# Altium PCB AM6442 X7.PcbDoc (part 2 of 2)
Units mm, origin at the board's own origin, x right, y up, seen from the top; angles counter-clockwise.
Board outline 52 x 52 mm, 8 copper layers (SU, GNDU, HSU, PWRU, PWRD, HSD, GNDD, SD), stack 0.757 mm thick; 216 components, 45 nets, 958 pads, 229 vias.
Unrouted connection lines stored in the file: 81.
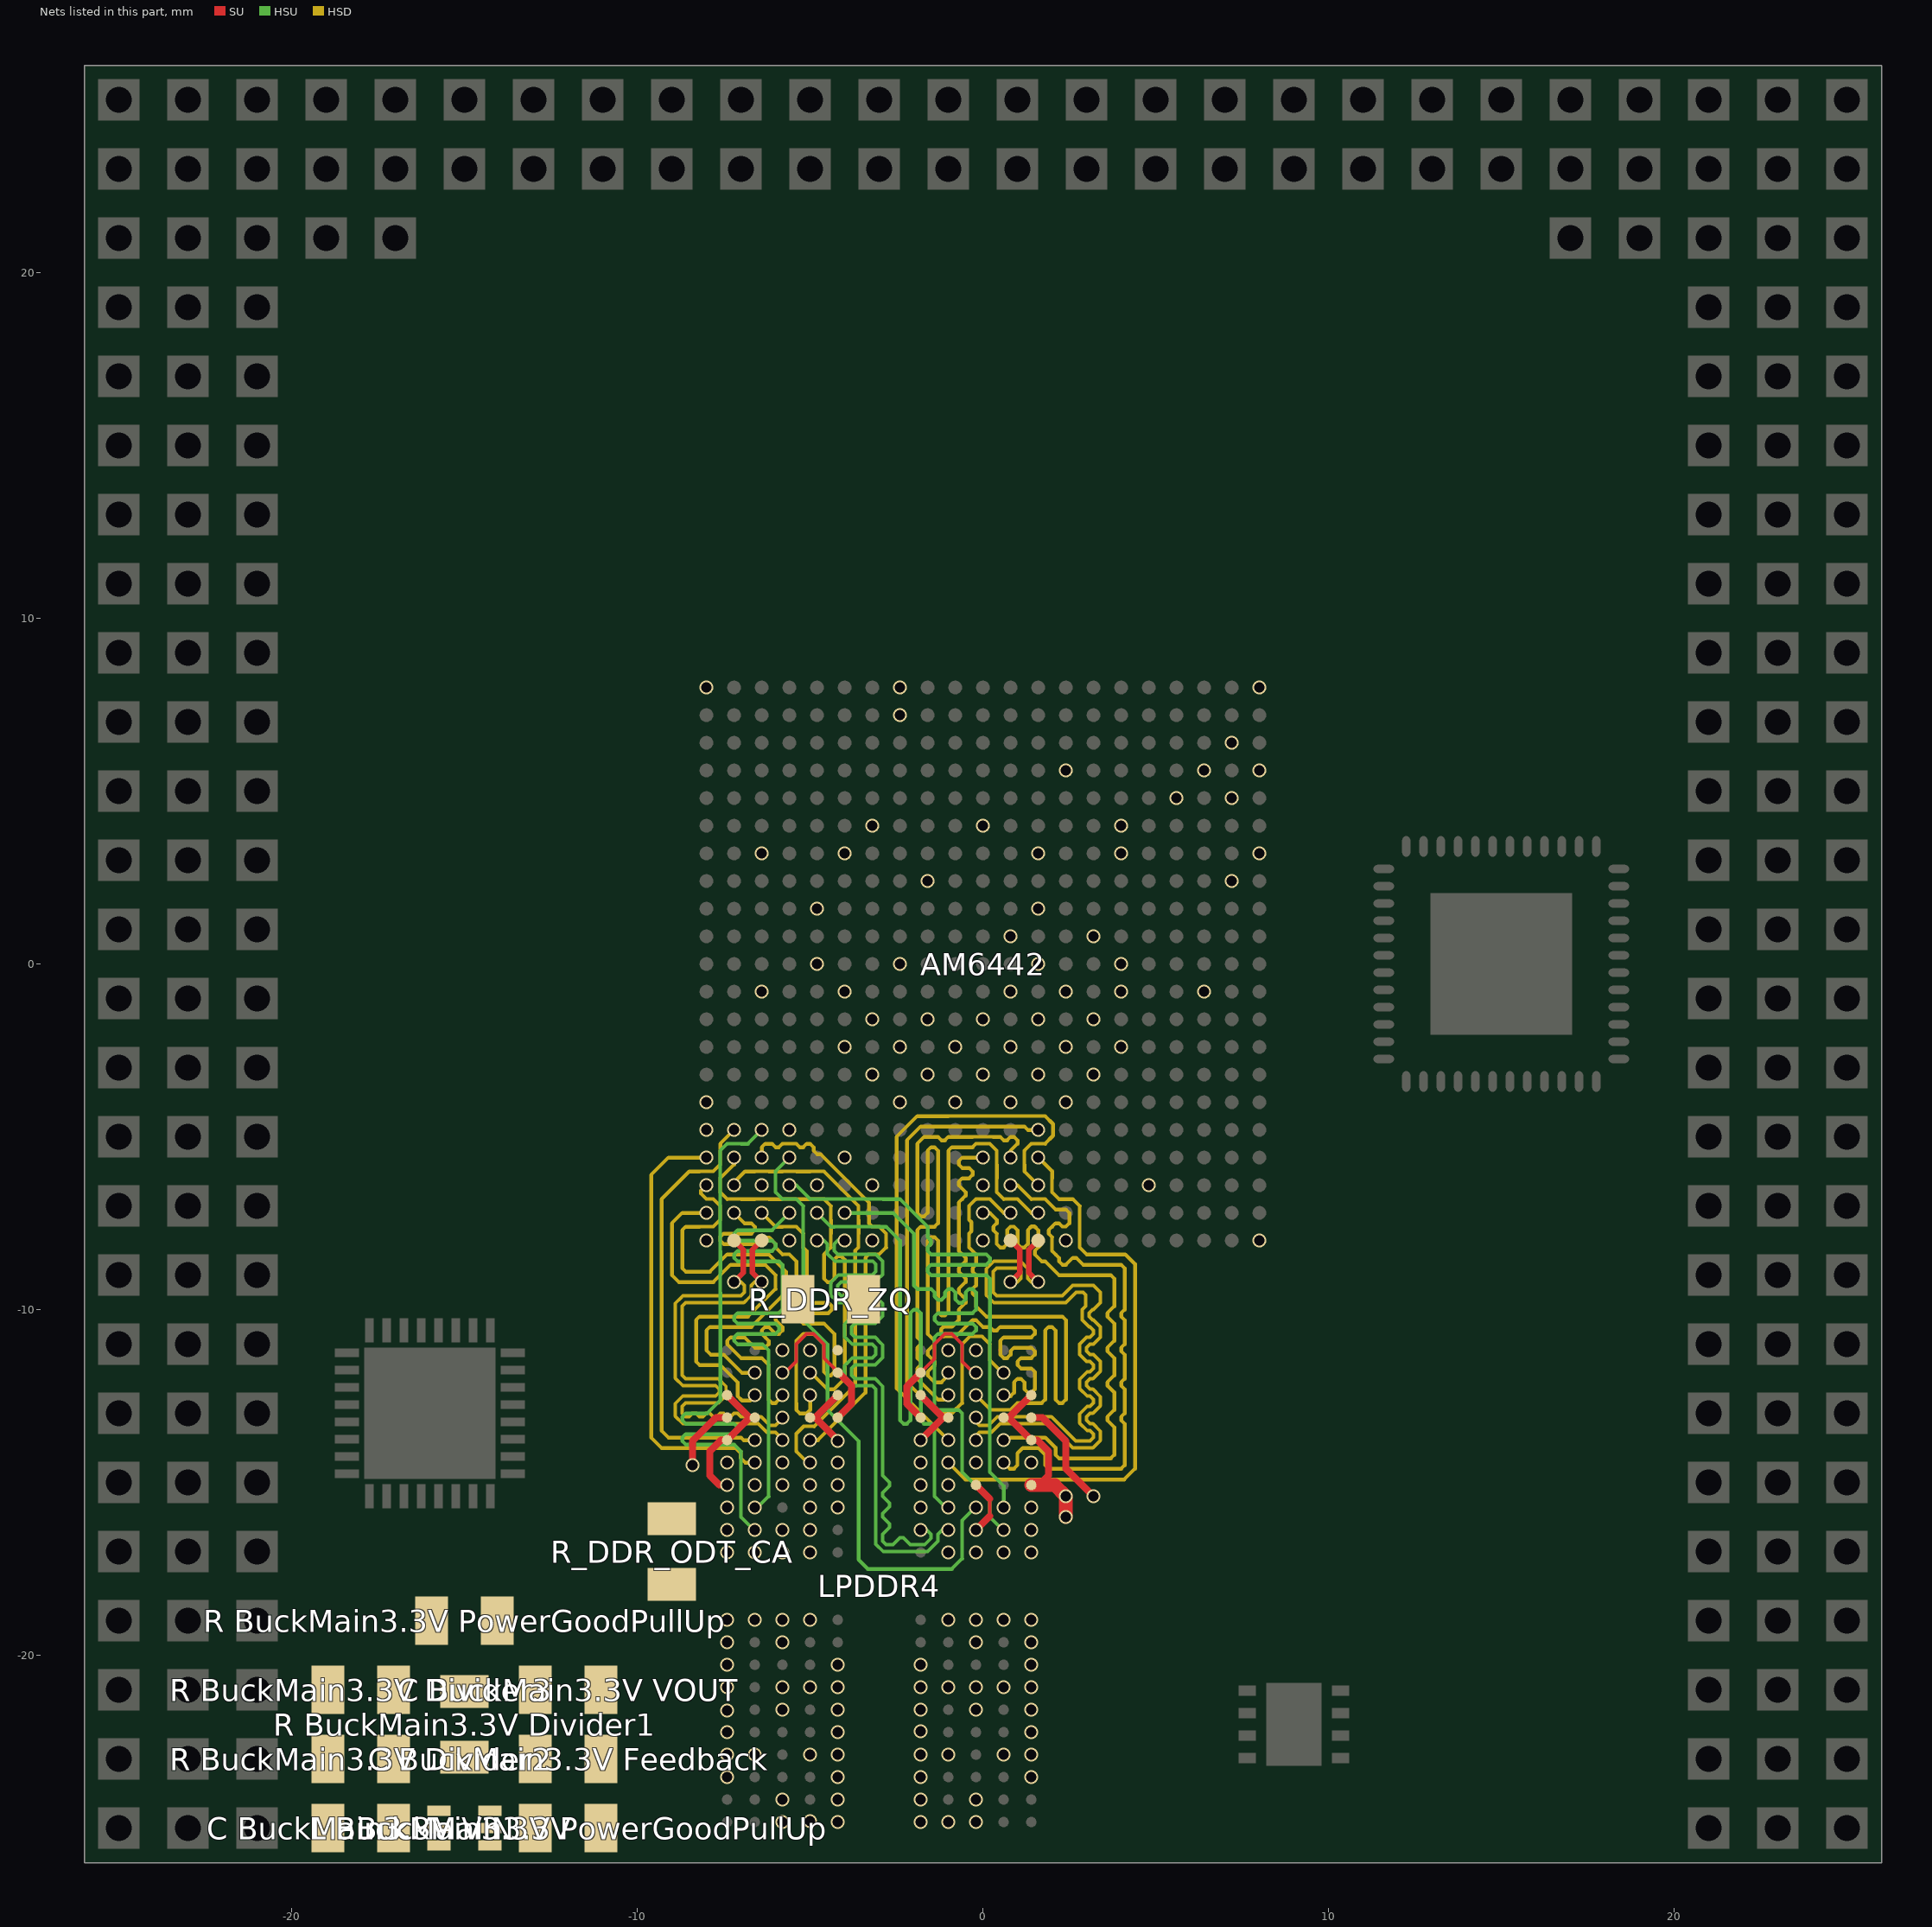
[diagram p6: the nets of this part, all layers, seen from the top]

## Part data
AM6442: library part AM6442, MANUFACTURER_NAME="Texas Instruments", MANUFACTURER_PART_NUMBER=AM6442BSDGHAALV, Package=BGA441C80P21X21_1720X1720X265, DeviceSetName=AM6442BSDGHAALV, GateName_1=G$1, HEIGHT=2.652mm, LibraryName=TOTUDU, MOUSER_PRICE-STOCK=https://www.mouser.co.uk/ProductDetail/Texas-Instruments/AM6442BSDGHAALV?qs=9vOqFld9vZW%2FXHhHYd31hA%3D%3D, SymbolName_1=AM6442BSDGHAALV
BERG1 BERG2 BERG3 BERG4 BERG5 BERG6 BERG7 BERG8 BERG9 BERG10 BERG11 BERG12 BERG13 BERG14 BERG15 BERG16 BERG17 BERG18 BERG19 BERG20 BERG21 BERG22 BERG23 BERG24 BERG25 BERG26 BERG27 BERG28 BERG29 BERG30 BERG31 BERG32 BERG33 BERG34 BERG35 BERG36 BERG37 BERG38 BERG39 BERG40 BERG41 BERG42 BERG43 BERG44 BERG45 BERG46 BERG47 BERG48 BERG49 BERG50 BERG51 BERG52 BERG53 BERG54 BERG55 BERG56 BERG57 BERG58 BERG59 BERG60 BERG61 BERG62 BERG63 BERG64 BERG65 BERG66 BERG67 BERG68 BERG69 BERG70 BERG71 BERG72 BERG73 BERG74 BERG75 BERG76 BERG77 BERG78 BERG79 BERG80 BERG81 BERG82 BERG83 BERG84 BERG85 BERG86 BERG87 BERG88 BERG89 BERG90 BERG91 BERG92 BERG93 BERG94 BERG95 BERG96 BERG97 BERG98 BERG99 BERG100 BERG101 BERG102 BERG103 BERG104 BERG105 BERG106 BERG107 BERG108 BERG109 BERG110 BERG111 BERG112 BERG113 BERG114 BERG115 BERG116 BERG117 BERG118 BERG119 BERG120 BERG121 BERG122 BERG123 BERG124 BERG125 BERG126 BERG127 BERG128 BERG129 BERG130 BERG131 BERG132 BERG133 BERG134 BERG135 BERG136 BERG137 BERG138 BERG139 BERG140 BERG141 BERG142 BERG143 BERG144 BERG145 BERG146 BERG147 BERG148 BERG149 BERG150 BERG151 BERG152 BERG153 BERG154 BERG155 BERG156 BERG157 BERG158 BERG159 BERG160 BERG161 BERG162 BERG163 BERG164 BERG165 BERG166 BERG167 BERG168 BERG169 BERG170 BERG171 BERG172 BERG173 BERG174 BERG175 BERG176 BERG177 BERG178 BERG179 BERG180 BERG181 BERG182 BERG183 BERG184 BERG185 BERG186 BERG187 BERG188 BERG189 BERG190 BERG191 BERG192 BERG193 BERG194 BERG195 BERG196 BERG197 BERG198 BERG199 BERG200: Package=HDRV1W50P0_1X1_200X200X800C, DeviceSetName=1PINHEADER, GateName_1=G$1, LibraryName=TOTUDU, SymbolName_1=1PINHEADER
BuckMain3.3V PMIC1: Mfr_Name="Texas Instruments", RefDes=RefDes
  BuckMain3.3V: Type=TYPE
  PMIC1: Type="Power Management"
"C BuckMain3.3V Feedback" "C BuckMain3.3V VIN" "C BuckMain3.3V VOUT": library part Capacitor
DP83867IRRGZR: Alternate_PartNumber=DP83867IRRGZT, Manufacturer="Texas Instruments", CompType=IC, Mfr_Name="Texas Instruments", MountType=SMT, PackageReference=RGZ0048B, PartNumber=DP83867IRRGZR, RefDes=RefDes, RoHS=Y, Type=TYPE
LPDDR4: library part "LPDDR4 D1611PM3BDGUI-U", MANUFACTURER_NAME="Kingston Technology", MANUFACTURER_PART_NUMBER=D1611PM3BDGUI-U, Package=BGA200C65P12X22_1000X1450X80, DeviceSetName=LPDDR4_D1611PM3BDGUI-U, GateName_1=G$1, HEIGHT=0.8mm, LibraryName=TOTUDU, SymbolName_1=LPDDR4_D1611PM3BDGUI-U
LS1: Manufacturer="Texas Instruments", PartNumber=TPS22959DNY, CompType=IC, Mfr_Name="Texas Instruments", MountType=SMT, PackageReference=DNY0008A, RefDes=RefDes, RoHS=Y, Type=TYPE
"R BuckMain3.3V Divider1": "3K"
"R BuckMain3.3V Divider2": "1.5K"
"R BuckMain3.3V Divider3": "1K"
"R BuckMain3.3V PowerGoodPullUp": "10K"

## Via types
v1: diameter 0.4/0.4/0.4/0.4/0.4/0.4/0.4/0.4 (per signal layer), hole 0.3, SU to SD, 228 vias
v2: diameter 0.4, hole 0.3, SU to SD, 1 vias

## Nets (pads, with @x,y where several pads share a name; then routed paths per layer and width w, separated by ;. In a path a pad name is that pad's centre, name@x,y a point inside that pad or via, vN(x,y) a via of type N, cw(c..) or ccw(c..) an arc to the next point about the centre after c; other vN are vias at no path point)
3.3V: "C BuckMain3.3V Feedback.1" "C BuckMain3.3V VOUT.2" "L BuckMain3.3V PowerGoodPullUp.2" "R BuckMain3.3V Divider1.2"
5V: "C BuckMain3.3V VIN.2" "R BuckMain3.3V PowerGoodPullUp.2" BuckMain3.3V.3 BuckMain3.3V.4
DDR_A0: AM6442.D2 LPDDR4.H2 | length 17.9
  HSU w0.1: -6.38,-11 -6.2,-11.18 -6.2,-15.4
  HSU w0.112: v1(-6.6,-15.725) -6.525,-15.725 -6.2,-15.4 ; -6.38,-11 -7.1,-11 -7.2,-10.9 -7.2,-10.8 -7.1,-10.7 -6,-10.7 -5.9,-10.6 -5.9,-10.5 -6,-10.4 -7.1,-10.4 -7.2,-10.3 -7.2,-10.2 -7.1,-10.1 -5.9,-10.1 -5.8,-10 -5.8,-8.7 -5.9,-8.6 -7.1,-8.6 -7.2,-8.5 -7.2,-8.4 -7.1,-8.3 -6.1,-8.3 -6,-8.2 -6,-8.1 -6.1,-8 -7.1,-8 -7.2,-7.9 -7.2,-7.8 -7.1,-7.7 -6.1,-7.7 v1(-5.6,-7.2)
DDR_A1: AM6442.C5 LPDDR4.J2 | length 17.9
  HSU w0.1: -7.6,-9.5 -7.6,-8.9 ; -7.6,-8.3 -7.6,-5.4 ; -7.4,-5.2 -7,-5.2 ; -7,-16 -7,-14.1
  HSU w0.112: -7.6,-9.5 -7.6,-12.626 -7.974,-13 -8.6,-13 -8.7,-13.1 -8.7,-13.2 -8.6,-13.3 -7.2,-13.3 -7.1,-13.4 -7.1,-13.5 -7.2,-13.6 -8.6,-13.6 -8.7,-13.7 -8.7,-13.8 -8.6,-13.9 -7.2,-13.9 -7,-14.1 ; -7.6,-8.9 -7.6,-8.3 ; -7.6,-5.4 -7.4,-5.2 ; -7,-16 -6.625,-16.375 v1(-6.6,-16.375) ; -7,-5.2 -6.8,-5.2 v1@-6.4,-4.8
  other v1: -6.4,-4.8
DDR_A2: AM6442.E2 LPDDR4.H9 | length 17.9
  HSU w0.1: -4.3,-7.6 -3,-7.6 ; -1.4,-15.4 -1.4,-13.4
  HSU w0.112: v1(-4.8,-7.2) -4.4,-7.6 -4.3,-7.6 ; -3,-7.6 -2.8,-7.6 -2.4,-8 -2.4,-13.2 -2.3,-13.3 -2.2,-13.3 -2.1,-13.2 -2.1,-10.1 -2,-10 -1.9,-10 -1.8,-10.1 -1.8,-13.202 -1.702,-13.3 -1.5,-13.3 -1.4,-13.4 ; -1.4,-15.4 -1.075,-15.725 v1(-1,-15.725)
DDR_A3: AM6442.D4 LPDDR4.H10 | length 17.9
  HSU w0.1: -6,-6.6 -6,-6 ; -5.8,-6.8 -5.4,-6.8 ; -5.2,-8.3 -5.2,-7 ; -0.6,-17.2 -0.6,-16.1
  HSU w0.112: -6,-6.6 -5.8,-6.8 ; -6,-6 v1(-5.6,-5.6) ; -5.4,-6.8 -5.2,-7 ; -5.2,-8.3 -5.2,-10.3 -4.5,-11 -4.5,-12.9 -3.6,-13.8 -3.6,-17.23 -3.33,-17.5 -0.9,-17.5 -0.6,-17.2 ; -0.6,-16.1 -0.225,-15.725 v1(-0.2,-15.725)
DDR_A4: AM6442.D3 LPDDR4.H11 | length 17.9
  HSU w0.1: -5,-6.8 -2.9,-6.8 ; -0.2,-8.4 0.1,-8.4 0.2,-8.5 ; 0.2,-14.7 0.2,-10.9
  HSU w0.112: v1(-5.6,-6.4) -5.4,-6.4 -5,-6.8 ; -2.9,-6.8 -2.4,-6.8 -1.6,-7.6 -1.6,-7.9 -1.504,-7.996 -1.504,-8.104 -1.6,-8.2 -1.6,-8.3 -1.5,-8.4 -0.2,-8.4 ; 0.2,-14.7 0.6,-15.1 v1(0.6,-15.725) ; 0.2,-10.9 0.2,-9.1 0.1,-9 -1.5,-9 -1.6,-8.9 -1.6,-8.8 -1.5,-8.7 0.1,-8.7 0.2,-8.6 0.2,-8.5
DDR_A5: AM6442.F2 LPDDR4.J11 | length 17.9
  HSU w0.1: -1.4,-12.8 -1.4,-10.8 ; -0.7,-12.9 -0.6,-13 -0.6,-14.7 ; 0.199,-15.999 0.199,-15.499
  HSU w0.112: v1(-4,-7.2) -2.6,-7.2 -2,-7.8 -2,-9.3 -1.9,-9.4 -1.5,-9.4 -1.4,-9.5 -1.4,-9.618 -1.3,-9.718 -1.2,-9.718 -1.1,-9.618 -1.1,-9.5 -1,-9.4 -0.9,-9.4 -0.8,-9.5 -0.8,-9.7 -0.7,-9.8 -0.6,-9.8 -0.5,-9.7 -0.5,-9.5 -0.4,-9.4 -0.3,-9.4 -0.2,-9.5 -0.2,-10 -0.3,-10.1 -1.3,-10.1 -1.4,-10.2 -1.4,-10.3 -1.3,-10.4 -0.3,-10.4 -0.2,-10.5 -0.2,-10.6 -0.3,-10.7 -1.3,-10.7 -1.4,-10.8 ; -1.4,-12.8 -1.3,-12.9 -0.7,-12.9 ; -0.6,-14.7 0.199,-15.499 ; 0.199,-15.999 0.575,-16.375 v1(0.6,-16.375)
DDR_CK0_N: AM6442.E1 LPDDR4.J9 | length 17.9
  HSU w0.096: v1(-4.8,-8) -4.6,-8 -4.5,-8.1 -4.5,-8.383 -4.283,-8.6 -3.183,-8.6 -3.1,-8.683 -3.1,-8.9 -3.2,-9 -4.183,-9 -4.4,-9.217 -4.4,-9.583 -4.241,-9.741 -4.183,-9.8 -3.2,-9.8 -3.1,-9.9 -3.1,-10.1 -3.2,-10.2 -3.783,-10.2 -3.941,-10.359 -4,-10.417 -4,-10.783 -3.783,-11 -3.2,-11 -3.1,-11.1 -3.1,-11.3 -3.2,-11.4 -3.783,-11.4 -3.941,-11.559 -4,-11.617 -4,-11.983 -3.841,-12.141 -3.783,-12.2 -3.2,-12.2 -3.1,-12.3 -3.1,-16.783 -2.883,-17 -1.6,-17 -1.3,-16.7 -1.3,-16.5 -1.175,-16.375 v1(-1,-16.375)
DDR_CK0_P: AM6442.F1 LPDDR4.J8 | length 17.9
  HSU w0.096: v1(-4,-8) -4.2,-8 -4.3,-8.1 -4.3,-8.3 -4.2,-8.4 -3.1,-8.4 -2.9,-8.6 -2.9,-8.983 -3.059,-9.141 -3.117,-9.2 -4.1,-9.2 -4.2,-9.3 -4.2,-9.5 -4.1,-9.6 -3.117,-9.6 -2.9,-9.817 -2.9,-10.183 -3.117,-10.4 -3.7,-10.4 -3.8,-10.5 -3.8,-10.7 -3.7,-10.8 -3.117,-10.8 -2.959,-10.959 -2.9,-11.017 -2.9,-11.383 -3.117,-11.6 -3.7,-11.6 -3.8,-11.7 -3.8,-11.9 -3.7,-12 -3.117,-12 -2.9,-12.217 -2.9,-14.8 -2.7,-15 -2.7,-15.1 -2.9,-15.3 -2.9,-15.4 -2.7,-15.6 -2.7,-15.7 -2.9,-15.9 -2.9,-16 -2.7,-16.2 -2.7,-16.3 -2.9,-16.5 -2.9,-16.7 -2.8,-16.8 -2.6,-16.8 -2.4,-16.6 -2.3,-16.6 -2.1,-16.8 -1.683,-16.8 -1.5,-16.617 -1.5,-16.5 -1.625,-16.375 v1(-1.8,-16.375)
DDR_CKE: AM6442.F4 LPDDR4.J4
  other v1: -5,-16.375 -4,-5.6
DDR_CS: AM6442.E3 LPDDR4.H4
  other v1: -5,-15.725 -4.8,-6.4
DDR_DM0: AM6442.B2 LPDDR4.C3 | length 12.8
  HSD w0.1: -7.5,-8.1 -7.6,-8 -7.6,-7.9 -7.5,-7.8 ; -6.2,-12.6 -6.2,-11.6 ; -5.8,-8.4 -5.6,-8.4 -5.4,-8.6
  HSD w0.112: -7.5,-8.1 -6.55,-8.1 -6.371,-7.921 -6.181,-7.921 -6,-8.101 -6,-8.2 -5.8,-8.4 ; -7.5,-7.8 -6.7,-7.8 -6.6,-7.7 -6.6,-7.6 -6.7,-7.5 -6.9,-7.5 v1(-7.2,-7.2) ; -6.2,-12.6 -6.1,-12.7 -6,-12.7 -5.8,-12.5 v1(-5.8,-12.475) ; -6.2,-11.6 -6.4,-11.4 -7,-11.4 -7.4,-11 -7.4,-10.9 -7.3,-10.8 -6.9,-10.8 -6.6,-11.1 -6.3,-11.1 -6.2,-11 -6.2,-10.9 -6.3,-10.8 -6.4,-10.7 -6.4,-10.6 -6.3,-10.5 -6.2,-10.5 -6,-10.7 -5.9,-10.7 -5.8,-10.6 -5.8,-10.5 -6,-10.3 -6,-10.2 -5.4,-9.6 -5.4,-8.6
DDR_DM1: AM6442.M2 LPDDR4.C10 | length 16.8
  HSD w0.1: -0.4,-8.2 -0.4,-7.8 ; -0.4,-7.4 -0.4,-7 ; -0.2,-6.8 0.2,-6.8 ; 0.225,-12.9 0.8,-12.9 1,-12.7
  HSD w0.112: -0.4,-8.2 -0.2,-8.4 -0.2,-8.7 -0.3,-8.8 -0.3,-8.9 -0.2,-9 -0.2,-9.3 -0.3,-9.4 -0.3,-9.528 -0.2,-9.628 -0.2,-9.9 0.1,-10.2 2.3,-10.2 2.4,-10.3 2.4,-12.6 2.3,-12.7 2.2,-12.7 2.1,-12.6 2.1,-10.6 2,-10.5 1.9,-10.5 1.8,-10.6 1.8,-12.6 1.7,-12.7 1,-12.7 ; -0.4,-7.8 -0.329,-7.729 -0.329,-7.471 -0.4,-7.4 ; -0.4,-7 -0.2,-6.8 ; v1(-0.2,-12.475) 0.225,-12.9 ; 0.2,-6.8 0.6,-7.2 v1(0.8,-7.2)
DDR_DQ0: AM6442.A3 LPDDR4.B2 | length 12.8
  HSD w0.1: -8.2,-7.6 -7.8,-7.6 -7.6,-7.4 -7.6,-7 -7.8,-6.8 -8.001,-6.8 -8.151,-6.649
  HSD w0.112: -8.2,-7.6 -8.6,-7.6 -8.7,-7.7 -8.7,-8.8 -8.6,-8.9 -7.9,-8.9 -7.4,-8.4 -6.2,-8.4 -5.8,-8.8 -5.7,-8.9 -5.7,-9.5 -6.7,-10.5 -7.9,-10.5 -8,-10.6 -8,-11.175 -7.875,-11.3 -7.5,-11.3 -6.975,-11.825 v1(-6.6,-11.825) ; -8.151,-6.649 -8.151,-6.551 v1(-8,-6.4)
DDR_DQ1: AM6442.A2 LPDDR4.C2 | length 12.8
  HSD w0.1: -6,-9.4 -6,-9
  HSD w0.112: v1(-8,-7.2) -8.7,-7.2 -9,-7.5 -9,-9 -8.8,-9.2 -7.8,-9.2 -7.3,-8.7 -6.3,-8.7 -6,-9 ; v1(-6.6,-12.475) -6.6,-12.5 -6.732,-12.632 -6.968,-12.632 -7.1,-12.501 -7.1,-12.1 -7.6,-11.6 -8.2,-11.6 -8.3,-11.5 -8.3,-10.3 -8.2,-10.2 -6.8,-10.2 -6,-9.4
DDR_DQ2: AM6442.B5 LPDDR4.E2 | length 12.8
  HSD w0.1: -8.2,-6 -7.8,-6 -7.6,-5.8 -7.6,-5.4
  HSD w0.112: -8.2,-6 -8.491,-6 -9.3,-6.809 -9.3,-13.5 -9.1,-13.7 -7,-13.7 -6.925,-13.775 v1(-6.6,-13.775) ; -7.6,-5.4 -7.6,-5.2 v1(-7.2,-4.8)
DDR_DQ3: AM6442.A4 LPDDR4.F2 | length 12.8
  HSD w0.112: v1(-8,-5.6) -9.1,-5.6 -9.6,-6.1 -9.6,-13.7 -9.3,-14 -7.162,-14 -7.001,-14.161 -7.001,-14.299 -6.875,-14.425 v1(-6.6,-14.425)
DDR_DQ4: AM6442.B3 LPDDR4.F4 | length 12.9
  HSD w0.1: -6.6,-6 -6.2,-6 ; -5.8,-6 -5.4,-6 ; -5.399,-14.099 -5.399,-13.59 ; -5.185,-13.376 -4.876,-13.376 ; -5,-6 -4.6,-6 ; -3.601,-8.2 -3.6,-8.199 -3.6,-7.8 ; -3.601,-6.999 -3.6,-7 -3.6,-7.4
  HSD w0.112: v1(-7.2,-6.4) -7.2,-6.318 -6.882,-6 -6.6,-6 ; -6.2,-6 -5.8,-6 ; -5.4,-6 -5,-6 ; -5.399,-14.099 -5.4,-14.1 -5.075,-14.425 v1(-5,-14.425) v1@-5,-14.339 ; -5.399,-13.59 -5.185,-13.376 ; -4.876,-13.376 -3.7,-12.2 -3.7,-8.299 -3.601,-8.2 ; -4.6,-6 -3.601,-6.999 ; -3.6,-7.8 -3.6,-7.4
DDR_DQ5: AM6442.C4 LPDDR4.E4 | length 12.8
  HSD w0.1: -5.8,-5.2 -5.4,-5.2 ; -3.3,-8.4 -3,-8.4 -2.8,-8.2 ; -3.3,-7.5 -3.2,-7.6 -3,-7.6 -2.801,-7.799 -2.801,-8.199
  HSD w0.112: v1(-6.4,-5.6) -6.4,-5.3 -6.3,-5.2 -6.1,-5.2 -5.999,-5.301 -5.901,-5.301 -5.8,-5.2 ; -5.4,-5.2 -5.3,-5.3 -5.2,-5.3 -5.1,-5.2 -5,-5.2 -4.9,-5.3 -4.9,-5.4 -4.8,-5.5 -4.7,-5.5 -3.3,-6.9 -3.3,-7.5 ; v1(-5,-13.775) -4.775,-13.775 -3.4,-12.4 -3.4,-8.5 -3.3,-8.4 ; -2.801,-8.199 -2.8,-8.2
DDR_DQ6: AM6442.C2 LPDDR4.C4 | length 12.8
  HSD w0.1: -5.8,-7.6 -5.4,-7.6 ; -5.4,-12.7 -5.4,-10.9 ; -5.2,-8.2 -5.2,-7.8 ; -4.6,-11 -4.6,-11.8 -4.5,-11.9
  HSD w0.112: v1(-6.4,-7.2) -6,-7.6 -5.8,-7.6 ; -5.4,-12.7 -5.4,-12.9 -5.3,-13 -5.1,-13 -5,-12.9 v1(-5,-12.475) ; -5.4,-10.9 -5.2,-10.7 -4.9,-10.7 -4.6,-11 ; -5.4,-7.6 -5.2,-7.8 ; -5.2,-8.2 -5.1,-8.3 -5.1,-9.7 -5,-9.8 -4.466,-9.8 -4.366,-9.9 -4.365,-10 -4.465,-10.1 -5.2,-10.1 -5.3,-10.2 -5.3,-10.3 -5.2,-10.4 -4.6,-10.4 -4.3,-10.7 -4.3,-11.8 -4.4,-11.9 -4.5,-11.9
DDR_DQ7: AM6442.B4 LPDDR4.B4 | length 12.8
  HSD w0.1: -7.6,-6.6 -7.6,-6.2 ; -7.4,-6.8 -7,-6.8 ; -6.6,-6.8 -6.2,-6.8 ; -5.8,-6.8 -5.4,-6.8 ; -5,-6.8 -4.6,-6.8 ; -4.4,-8.2 -4.4,-7.8 ; -4.4,-7.4 -4.4,-7
  HSD w0.112: -7.6,-6.6 -7.4,-6.8 ; -7.6,-6.2 -7.2,-5.8 v1(-7.2,-5.6) ; -7,-6.8 -6.6,-6.8 ; -6.2,-6.8 -5.8,-6.8 ; -5.4,-6.8 -5,-6.8 ; v1(-5,-11.825) -4.975,-11.825 -4.5,-12.3 -4.3,-12.3 -4,-12 -4,-8.557 -4.1,-8.457 -4.2,-8.457 -4.3,-8.557 -4.3,-9.1 -4.4,-9.2 -4.5,-9.2 -4.6,-9.1 -4.6,-8.4 -4.4,-8.2 ; -4.6,-6.8 -4.4,-7 ; -4.4,-7.8 -4.4,-7.4
DDR_DQ8: AM6442.N5 LPDDR4.B11 | length 16.8
  HSD w0.1: -0.6,-12.7 -0.6,-11 ; -0.376,-10.776 -0.024,-10.776 ; 0.2,-11.46 0.2,-11
  HSD w0.112: -0.6,-12.7 -0.892,-12.992 -1.308,-12.992 -2.2,-12.1 -2.2,-5.1 -1.8,-4.7 1.2,-4.7 1.3,-4.8 v1(1.6,-4.8) ; -0.6,-11 -0.376,-10.776 ; -0.024,-10.776 0.2,-11 ; 0.2,-11.46 v1@0.525,-11.785 ; v1@0.525,-11.825 v1(0.6,-11.825)
DDR_DQ9: AM6442.L4 LPDDR4.C11 | length 16.8
  HSD w0.1: -1.134,-10.776 -0.776,-10.776
  HSD w0.112: -1.134,-10.776 -1.205,-10.704 -1.205,-10.563 -1.132,-10.489 -0.889,-10.489 -0.7,-10.3 -0.7,-10 -0.5,-9.8 -0.5,-9.7 -0.6,-9.6 -0.7,-9.5 -0.7,-9.4 -0.5,-9.2 -0.5,-9.1 -0.7,-8.9 -0.7,-8.8 -0.5,-8.6 -0.5,-8.5 -0.7,-8.3 -0.7,-6.9 -0.6,-6.8 -0.5,-6.7 -0.5,-6.6 -0.7,-6.4 -0.7,-6.3 -0.6,-6.2 -0.4,-6.2 -0.3,-6.1 -0.3,-6 -0.4,-5.9 -0.6,-5.9 -0.7,-5.8 -0.7,-5.7 -0.6,-5.6 v1@0,-5.6 ; -0.776,-10.776 -0.3,-10.3 -0.2,-10.3 0,-10.5 0.2,-10.5 0.3,-10.6 0.4,-10.6 0.5,-10.5 1.4,-10.5 1.5,-10.6 1.5,-10.7 1.4,-10.8 0.6,-10.8 0.5,-10.9 0.5,-11.3 0.6,-11.4 0.7,-11.4 0.8,-11.3 0.8,-11.2 0.9,-11.1 1.4,-11.1 1.5,-11.2 1.5,-11.3 1.4,-11.4 1.1,-11.4 1,-11.5 1,-11.6 1.1,-11.7 1.4,-11.7 1.5,-11.8 1.5,-12.3 1.4,-12.4 1.3,-12.4 1.2,-12.3 1.2,-12.1 1.1,-12 1,-12 0.9,-12.1 0.9,-12.4 0.8,-12.5 0.625,-12.5 v1(0.6,-12.475)
  other v1: 0,-5.6
DDR_DQ10: AM6442.L2 LPDDR4.E11 | length 16.8
  HSD w0.1: 0.4,-7.8 0.4,-8.1 0.5,-8.2 ; 0.7,-7.7 0.8,-7.6 0.9,-7.6 1,-7.7
  HSD w0.112: v1(0,-7.2) 0.2,-7.2 0.4,-7.4 0.4,-7.5 0.3,-7.6 0.3,-7.7 0.4,-7.8 ; 0.5,-8.2 0.6,-8.2 0.7,-8.1 0.7,-7.7 ; v1(0.6,-13.775) 0.725,-13.775 0.8,-13.7 1.805,-13.7 2.1,-13.995 2.1,-14.2 2.2,-14.3 3.7,-14.3 3.8,-14.2 3.8,-13.8 3.8,-13.4 3.6,-13.2 3.6,-13.1 3.8,-12.9 3.8,-12.397 3.603,-12.2 3.6,-12.2 3.6,-12.1 3.8,-11.9 3.8,-11.4 3.6,-11.2 3.6,-11.1 3.8,-10.9 3.8,-10.8 3.8,-10.4 3.6,-10.2 3.6,-10.1 3.8,-9.9 3.8,-9.8 3.8,-9.1 3.7,-9 2.2,-9 1.8,-8.6 1.7,-8.6 1.5,-8.4 1.5,-8.3 1.677,-8.123 1.677,-7.977 1.6,-7.9 1.6,-7.7 1.491,-7.591 1.409,-7.591 1.3,-7.7 1.3,-8.1 1.2,-8.2 1.1,-8.2 1,-8.1 1,-7.7
DDR_DQ11: AM6442.M3 LPDDR4.F11 | length 16.8
  HSD w0.1: 0.9,-14.6 1,-14.5 1,-14.159 ; 1.4,-6.8 1.8,-6.8 ; 1.8,-14.2 1.8,-14.5 1.9,-14.6 ; 2,-8.3 2,-7.9 ; 2.2,-7.5 2.3,-7.6 2.4,-7.6 2.5,-7.5
  HSD w0.112: v1(0.6,-14.425) 0.775,-14.6 0.9,-14.6 ; v1(0.8,-6.4) 1,-6.4 1.4,-6.8 ; 1,-14.159 1.159,-14 1.6,-14 1.8,-14.2 ; 1.8,-6.8 2.1,-7.1 2.4,-7.1 2.5,-7.2 2.5,-7.5 ; 1.9,-14.6 4,-14.6 4.1,-14.5 4.1,-13.3 4,-13.2 4,-13.1 4.1,-13 4.1,-12.3 4,-12.2 4,-12.1 4.1,-12 4.1,-11.3 4,-11.2 4,-11.1 4.1,-11 4.1,-10.3 4,-10.2 4,-10.1 4.1,-10 4.1,-8.8 4,-8.7 2.9,-8.7 2.7,-8.5 2.6,-8.5 2.4,-8.7 2.3,-8.7 2.2,-8.6 2.2,-8.5 2.1,-8.4 2,-8.3 ; 2,-7.9 1.9,-7.8 1.9,-7.7 2,-7.6 2.1,-7.5 2.2,-7.5
DDR_DQ12: AM6442.N4 LPDDR4.F9 | length 16.8
  HSD w0.1: 2,-6.6 2,-6.2 ; 2.8,-8.2 2.8,-7
  HSD w0.112: v1(-1,-14.425) -0.512,-14.912 4.088,-14.912 4.4,-14.6 4.4,-8.678 4.122,-8.4 3,-8.4 2.8,-8.2 ; v1@1.6,-5.595 2,-5.995 2,-6.2 ; 2,-6.6 2.2,-6.8 2.6,-6.8 2.8,-7
  other v1: 1.6,-5.6
DDR_DQ13: AM6442.N3 LPDDR4.E9 | length 16.8
  HSD w0.1: -1,-4.4 1.8,-4.4 ; 1.2,-5.8 1.2,-5.4 ; 1.4,-5.2 1.8,-5.2
  HSD w0.112: v1(-1,-13.775) -2.5,-12.275 -2.5,-5 -1.9,-4.4 -1,-4.4 ; 1.2,-5.8 1.2,-6 v1(1.6,-6.4) ; 1.2,-5.4 1.4,-5.2 ; 1.8,-5.2 2.034,-4.966 2.034,-4.634 1.8,-4.4
DDR_DQ14: AM6442.M4 LPDDR4.C9 | length 16.8
  HSD w0.1: -0.3,-5 0.295,-5
  HSD w0.112: v1(-1,-12.475) -1.126,-12.601 -1.299,-12.601 -1.9,-12 -1.9,-11.7 -1.8,-11.6 -1.8,-11.5 -1.9,-11.4 -1.9,-11.1 -1.8,-11 -1.8,-10.9 -1.9,-10.8 -1.9,-7.7 -1.8,-7.6 -1.4,-7.6 -1.3,-7.5 -1.3,-5.4 -1.4,-5.3 -1.5,-5.3 -1.6,-5.4 -1.6,-7.2 -1.7,-7.3 -1.8,-7.3 -1.9,-7.2 -1.9,-5.2 -1.7,-5 -1.3,-5 -1.2,-5.1 -1.1,-5.1 -1,-5 -0.3,-5 ; 0.295,-5 0.5,-5 0.6,-5.1 0.7,-5.1 0.8,-5 0.9,-5 1,-5.1 1,-5.2 0.8,-5.4 v1(0.8,-5.6)
DDR_DQ15: AM6442.N2 LPDDR4.B9 | length 16.8
  HSD w0.1: -0.3,-5.3 -0.2,-5.2 0.2,-5.2 0.4,-5.4 0.4,-5.8 ; 0.4,-6.6 0.4,-6.2 ; 0.6,-6.8 1,-6.8
  HSD w0.112: v1(-1,-11.825) -1,-11.9 -1.2,-12.1 -1.4,-12.1 -1.5,-12 -1.6,-11.9 -1.6,-11.8 -1.4,-11.6 -1.4,-11.5 -1.6,-11.3 -1.6,-11.2 -1.4,-11 -1.4,-10.9 -1.6,-10.7 -1.6,-8 -1.5,-7.9 -1.4,-7.9 -1.3,-8 -1.3,-10.068 -1.2,-10.168 -1.1,-10.168 -1,-10.068 -1,-5.4 -0.9,-5.3 -0.3,-5.3 ; 0.4,-6.6 0.6,-6.8 ; 0.4,-6.2 0.4,-5.8 ; 1,-6.8 1.4,-7.2 v1(1.6,-7.2)
DDR_DQS0_N: AM6442.B1 LPDDR4.E3 | length 12.9
  SU w0.16: v1(-7.2,-9.2) -6.93,-8.93 -6.93,-8.27 AM6442.B1@-7.2,-8
  HSD w0.096: v1(-7.2,-9.2) -7,-9.2 -6.9,-9.3 -6.9,-9.5 -7,-9.6 -8.683,-9.6 -8.741,-9.659 -8.9,-9.817 -8.9,-11.983 -8.683,-12.2 -7.733,-12.2 -7.633,-12.3 -7.633,-12.4 -7.733,-12.5 -8.683,-12.5 -8.9,-12.717 -8.9,-13.083 -8.683,-13.3 -6.5,-13.3 -6.25,-13.55 -6,-13.55 v1@-5.8,-13.75
  other v1: -5.8,-13.775
DDR_DQS0_P: AM6442.C1 LPDDR4.D3 | length 12.9
  SU w0.16: v1(-6.4,-9.2) -6.67,-8.93 -6.67,-8.27 AM6442.C1@-6.4,-8
  HSD w0.096: v1(-6.4,-9.2) -6.6,-9.2 -6.7,-9.3 -6.7,-9.583 -6.759,-9.641 -6.917,-9.8 -8.6,-9.8 -8.7,-9.9 -8.7,-11.9 -8.6,-12 -8.5,-12 -7.65,-12 -7.433,-12.217 -7.433,-12.483 -7.65,-12.7 -8.6,-12.7 -8.7,-12.8 -8.7,-13 -8.6,-13.1 -8.5,-13.1 -8.4,-13 -8.3,-13 -8.2,-13.1 -8.1,-13.1 -8,-13 -7.9,-13 -7.8,-13.1 -7.7,-13.1 -7.6,-13 -7.5,-13 -7.4,-13.1 -7.3,-13.1 -7.2,-13 -7.1,-13 -7,-13.1 -6.417,-13.1 -6.167,-13.35 -6,-13.35 v1@-5.8,-13.15
  other v1: -5.8,-13.125
DDR_DQS1_N: AM6442.M1 LPDDR4.E10 | length 16.9
  SU w0.16: v1(0.8,-9.2) 1.07,-8.93 1.07,-8.27 AM6442.M1@0.8,-8
  HSD w0.096: v1(-0.2,-13.775) -0.2,-13.65 -0.1,-13.55 0.25,-13.55 0.5,-13.3 1.9,-13.3 2.6,-14 3.183,-14 3.4,-13.783 3.4,-13.517 3.183,-13.3 3.1,-13.3 3,-13.2 3,-13.1 3.1,-13 3.183,-13 3.4,-12.783 3.4,-12.517 3.183,-12.3 3.1,-12.3 3,-12.2 3,-12.1 3.1,-12 3.183,-12 3.4,-11.783 3.4,-11.5 3.2,-11.3 3.1,-11.3 3,-11.2 3,-11.1 3.1,-11 3.2,-11 3.4,-10.8 3.4,-10.5 3.2,-10.3 3.172,-10.3 3.072,-10.2 3.072,-10.1 3.172,-10 3.2,-10 3.399,-9.801 3.399,-9.499 3.2,-9.3 2.6,-9.3 2.3,-9.6 0.4,-9.6 0.3,-9.5 0.3,-8.9 0.4,-8.8 1,-8.8 1.1,-8.9 1.1,-9.1 1,-9.2 v1(0.8,-9.2)
DDR_DQS1_P: AM6442.N1 LPDDR4.D10 | length 16.9
  SU w0.16: v1(1.6,-9.2) 1.33,-8.93 1.33,-8.27 AM6442.N1@1.6,-8
  HSD w0.096: v1(-0.2,-13.125) -0.2,-13.25 -0.1,-13.35 0.167,-13.35 0.417,-13.1 1.983,-13.1 2.683,-13.8 3.1,-13.8 3.2,-13.7 3.2,-13.6 3.1,-13.5 3.017,-13.5 2.8,-13.283 2.8,-13.017 3.017,-12.8 3.1,-12.8 3.2,-12.7 3.2,-12.6 3.1,-12.5 3.017,-12.5 2.8,-12.283 2.8,-12.017 3.017,-11.8 3.1,-11.8 3.2,-11.7 3.2,-11.6 3.1,-11.5 3,-11.5 2.8,-11.3 2.8,-11 3,-10.8 3.1,-10.8 3.2,-10.7 3.2,-10.6 3.1,-10.5 3.072,-10.5 2.872,-10.3 2.872,-10 2.972,-9.9 2.972,-9.572 2.9,-9.5 2.7,-9.5 2.4,-9.8 0.317,-9.8 0.2,-9.683 0.159,-9.641 0.1,-9.583 0.1,-8.817 0.317,-8.6 1.083,-8.6 1.3,-8.817 1.3,-9.1 1.4,-9.2 v1(1.6,-9.2)
DDR_ODT_CA: LPDDR4.G2 R_DDR_ODT_CA.1
  other v1: -6.6,-15.075
DDR_RESET: AM6442.D5 LPDDR4.T11
  other v1: 0.6,-20.925 -5.6,-4.8
DDR_VDD1: LPDDR4.F1 LPDDR4.F12 LPDDR4.G4 LPDDR4.G9 LPDDR4.T4 LPDDR4.T9 LPDDR4.U1 LPDDR4.U12 | length 0
  SU w0.1: v1(-1,-15.075) LPDDR4.G9@-0.975,-15.075
  other v1: -7.4,-21.6 1.4,-21.575 -5,-20.925 -1,-20.925 -5,-15.075 -7.4,-14.425 1.4,-14.425
DDR_VDD2: LPDDR4.A4 LPDDR4.A9 LPDDR4.AB4 LPDDR4.AB9 LPDDR4.F5 LPDDR4.F8 LPDDR4.H1 LPDDR4.H5 LPDDR4.H8 LPDDR4.H12 LPDDR4.K1 LPDDR4.K3 LPDDR4.K10 LPDDR4.K12 LPDDR4.N1 LPDDR4.N3 LPDDR4.N10 LPDDR4.N12 LPDDR4.R1 LPDDR4.R5 LPDDR4.R8 LPDDR4.R12 LPDDR4.U5 LPDDR4.U8 R_DDR_ODT_CA.2
  other v1: -1,-24.825 -5,-24.8 -4.2,-21.575 -1.8,-21.575 -7.4,-20.275 -4.2,-20.275 -1.8,-20.275 1.4,-20.275 -7.4,-18.975 -5.8,-18.975 -0.2,-18.975 1.4,-18.975 -7.4,-17.025 -5.8,-17.025 -0.2,-17.025 1.4,-17.025 -7.4,-15.725 -4.2,-15.725 -1.8,-15.725 1.4,-15.725 -4.2,-14.425 -1.8,-14.425 -5,-11.175 -1,-11.175
DDR_VDDQ: LPDDR4.AA3 LPDDR4.AA5 LPDDR4.AA8 LPDDR4.AA10 LPDDR4.B3 LPDDR4.B5 LPDDR4.B8 LPDDR4.B10 LPDDR4.D1 LPDDR4.D5 LPDDR4.D8 LPDDR4.D12 LPDDR4.F3 LPDDR4.F10 LPDDR4.U3 LPDDR4.U10 LPDDR4.W1 LPDDR4.W5 LPDDR4.W8 LPDDR4.W12 R_DDR_ZQ.2 | length 14.6
  SU w0.1: v1(-5.8,-11.825) -5.725,-11.825 -5.4,-11.5 -5.4,-11 -5.1,-10.7 -4.9,-10.7 -4.6,-11 -4.6,-11.4 -4.2,-11.8 LPDDR4.B5@-4.2,-11.825 ; LPDDR4.B8@-1.8,-11.825 -1.4,-11.425 -1.4,-11 -1.1,-10.7 -0.9,-10.7 -0.6,-11 -0.6,-11.5 -0.275,-11.825 v1(-0.2,-11.825)
  SU w0.2: v2(-8.4,-14.5) -8.4,-13.8 -7.725,-13.125 LPDDR4.D1@-7.4,-13.125 ; LPDDR4.D5@-4.2,-13.125 -3.8,-12.725 -3.8,-12.2 -4.175,-11.825 LPDDR4.B5@-4.2,-11.825 ; LPDDR4.D8@-1.8,-13.125 -2.2,-12.725 -2.2,-12.225 LPDDR4.B8@-1.8,-11.825 ; LPDDR4.D12@1.4,-13.125 1.725,-13.125 2.4,-13.8 2.4,-14.6 v1(3.2,-15.4)
  other v1: -5.8,-24.175 -4.2,-24.175 -1.8,-24.175 -0.2,-24.175 -7.4,-22.875 -4.2,-22.875 -1.8,-22.875 1.4,-22.875 -5.8,-21.575 -0.2,-21.575 -5.8,-14.425 -0.2,-14.425
DDR_ZQ: LPDDR4.A5 R_DDR_ZQ.1
GND: "C BuckMain3.3V VIN.1" "C BuckMain3.3V VOUT.1" "R BuckMain3.3V Divider3.2" AM6442.A1 AM6442.A5 AM6442.A6 AM6442.A21 AM6442.AA1 AM6442.AA15 AM6442.AA18 AM6442.AA21 AM6442.C3 AM6442.C10 AM6442.C15 AM6442.D1 AM6442.E11 AM6442.E13 AM6442.F8 AM6442.F10 AM6442.F15 AM6442.G1 AM6442.G3 AM6442.G7 AM6442.G9 AM6442.G16 AM6442.H6 AM6442.H8 AM6442.H11 AM6442.H20 AM6442.H21 AM6442.J7 AM6442.J9 AM6442.J14 AM6442.K6 AM6442.K8 AM6442.L1 AM6442.L3 AM6442.L7 AM6442.L9 AM6442.L16 AM6442.M6 AM6442.M8 AM6442.M10 AM6442.M12 AM6442.N7 AM6442.N9 AM6442.N11 AM6442.N13 AM6442.N15 AM6442.P1 AM6442.P6 AM6442.P8 AM6442.P10 AM6442.P18 AM6442.R7 AM6442.R9 AM6442.R12 AM6442.T8 AM6442.T10 AM6442.T11 AM6442.T15 AM6442.T16 AM6442.U3 AM6442.V17 AM6442.W10 AM6442.W18 AM6442.Y14 AM6442.Y17 AM6442.Y19 BuckMain3.3V.1 LPDDR4.A3 LPDDR4.A10 LPDDR4.AB3 LPDDR4.AB5 LPDDR4.AB8 LPDDR4.AB10 LPDDR4.C1 LPDDR4.C5 LPDDR4.C8 LPDDR4.C12 LPDDR4.D2 LPDDR4.D4 LPDDR4.D9 LPDDR4.D11 LPDDR4.E1 LPDDR4.E5 LPDDR4.E8 LPDDR4.E12 LPDDR4.G1 LPDDR4.G3 LPDDR4.G5 LPDDR4.G8 LPDDR4.G10 LPDDR4.G12 LPDDR4.J1 LPDDR4.J3 LPDDR4.J10 LPDDR4.J12 LPDDR4.K2 LPDDR4.K4 LPDDR4.K9 LPDDR4.K11 LPDDR4.N2 LPDDR4.N4 LPDDR4.N9 LPDDR4.N11 LPDDR4.P1 LPDDR4.P3 LPDDR4.P10 LPDDR4.P12 LPDDR4.T1 LPDDR4.T3 LPDDR4.T5 LPDDR4.T8 LPDDR4.T10 LPDDR4.T12 LPDDR4.V1 LPDDR4.V5 LPDDR4.V8 LPDDR4.V12 LPDDR4.W2 LPDDR4.W4 LPDDR4.W9 LPDDR4.W11 LPDDR4.Y1 LPDDR4.Y5 LPDDR4.Y8 LPDDR4.Y12 | length 15
  SU w0.1: 0.2,-15.975 0.2,-15.475
  SU w0.2: v1(-7.4,-15.075) -7.625,-15.075 -7.9,-14.8 -7.9,-14.1 -7.575,-13.775 LPDDR4.E1@-7.4,-13.775 -6.75,-13.125 ; LPDDR4.C1@-7.4,-12.475 -6.75,-13.125 ; LPDDR4.D2@-6.6,-13.125 -6.75,-13.125 ; LPDDR4.D4@-5,-13.125 -4.85,-13.125 ; LPDDR4.E5@-4.2,-13.775 -4.85,-13.125 ; LPDDR4.C5@-4.2,-12.475 -4.85,-13.125 ; v1(-1.8,-13.775) -1.15,-13.125 ; LPDDR4.C8@-1.8,-12.475 -1.15,-13.125 ; LPDDR4.D9@-1,-13.125 -1.15,-13.125 ; v1(-0.2,-16.375) 0.2,-15.975 ; LPDDR4.G10@-0.2,-15.075 0.2,-15.475 ; LPDDR4.D11@0.6,-13.125 0.75,-13.125 ; LPDDR4.C12@1.4,-12.475 0.75,-13.125 ; 1.625,-15.075 1.9,-14.8 1.9,-14.1 1.575,-13.775 LPDDR4.E12@1.4,-13.775 0.75,-13.125
  SU w0.4: LPDDR4.G12@1.4,-15.075 1.625,-15.075 2.075,-15.075 v1(2.4,-15.4) v1(2.4,-16)
  other v1: -5.8,-24.825 -4.2,-24.825 -1.8,-24.825 -0.2,-24.825 -7.4,-23.525 -4.2,-23.525 -1.8,-23.525 1.4,-23.525 -6.6,-22.875 -5,-22.875 -1,-22.875 0.6,-22.875 -7.4,-22.225 -4.2,-22.225 1.4,-22.225 -1.8,-22.2 -7.4,-20.925 -5.8,-20.925 -4.2,-20.925 -1.8,-20.925 -0.2,-20.925 1.4,-20.925 -7.4,-19.625 -5.8,-19.625 -0.2,-19.625 1.4,-19.625 -6.6,-18.975 -5,-18.975 -1,-18.975 0.6,-18.975 -6.6,-17.025 -5,-17.025 -1,-17.025 0.6,-17.025 -7.4,-16.375 -5.8,-16.375 1.4,-16.375 -5.8,-15.075 -4.2,-15.075 -1.8,-15.075 -4.2,-13.8 -5.8,-11.175 -0.2,-11.175 -8,-8 -5.6,-8 -3.2,-8 0,-8 2.4,-8 8,-8 -6.4,-6.4 -3.2,-6.4 0,-6.4 4.8,-6.4 -8,-4.8 -8,-4 -2.4,-4 -0.8,-4 0.8,-4 2.4,-4 -3.2,-3.2 -1.6,-3.2 0,-3.2 1.6,-3.2 3.2,-3.2 -4,-2.4 -2.4,-2.4 -0.8,-2.4 0.8,-2.4 2.4,-2.4 4,-2.4 -3.2,-1.6 -1.6,-1.6 0,-1.6 1.6,-1.6 3.2,-1.6 -6.4,-0.8 -4,-0.8 0.8,-0.8 2.4,-0.8 4,-0.8 6.4,-0.8 -4.8,0 -2.4,0 1.6,0 4,0 0.8,0.8 3.2,0.8 -4.8,1.6 1.6,1.6 -1.6,2.4 7.2,2.4 -6.4,3.2 -4,3.2 1.6,3.2 4,3.2 8,3.2 -3.2,4 0,4 4,4 5.6,4.8 7.2,4.8 2.4,5.6 6.4,5.6 8,5.6 7.2,6.4 -2.4,7.2 -8,8 -2.4,8 8,8
NetBuckMain3.3V_2: "L BuckMain3.3V PowerGoodPullUp.1" BuckMain3.3V.2
NetBuckMain3.3V_5: "C BuckMain3.3V Feedback.2" "R BuckMain3.3V Divider2.1" "R BuckMain3.3V Divider3.1" BuckMain3.3V.5
NetBuckMain3.3V_6: "R BuckMain3.3V PowerGoodPullUp.1" BuckMain3.3V.6
"NetR BuckMain3.3V Divider1_1": "R BuckMain3.3V Divider1.1" "R BuckMain3.3V Divider2.2"
pads on no net: AM6442.A7 AM6442.A8 AM6442.A9 AM6442.A10 AM6442.A11 AM6442.A12 AM6442.A13 AM6442.A14 AM6442.A15 AM6442.A16 AM6442.A17 AM6442.A18 AM6442.A19 AM6442.A20 AM6442.AA2 AM6442.AA3 AM6442.AA4 AM6442.AA5 AM6442.AA6 AM6442.AA7 AM6442.AA8 AM6442.AA9 AM6442.AA10 AM6442.AA11 AM6442.AA12 AM6442.AA13 AM6442.AA14 AM6442.AA16 AM6442.AA17 AM6442.AA19 AM6442.AA20 AM6442.B6 AM6442.B7 AM6442.B8 AM6442.B9 AM6442.B10 AM6442.B11 AM6442.B12 AM6442.B13 AM6442.B14 AM6442.B15 AM6442.B16 AM6442.B17 AM6442.B18 AM6442.B19 AM6442.B20 AM6442.B21 AM6442.C6 AM6442.C7 AM6442.C8 AM6442.C9 AM6442.C11 AM6442.C12 AM6442.C13 AM6442.C14 AM6442.C16 AM6442.C17 AM6442.C18 AM6442.C19 AM6442.C20 AM6442.C21 AM6442.D6 AM6442.D7 AM6442.D8 AM6442.D9 AM6442.D10 AM6442.D11 AM6442.D12 AM6442.D13 AM6442.D14 AM6442.D15 AM6442.D16 AM6442.D17 AM6442.D18 AM6442.D19 AM6442.D20 AM6442.D21 AM6442.E4 AM6442.E5 AM6442.E6 AM6442.E7 AM6442.E8 AM6442.E9 AM6442.E10 AM6442.E12 AM6442.E14 AM6442.E15 AM6442.E16 AM6442.E17 AM6442.E18 AM6442.E19 AM6442.E20 AM6442.E21 AM6442.F3 AM6442.F5 AM6442.F6 AM6442.F7 AM6442.F9 AM6442.F11 AM6442.F12 AM6442.F13 AM6442.F14 AM6442.F16 AM6442.F17 AM6442.F18 AM6442.F19 AM6442.F20 AM6442.F21 AM6442.G2 AM6442.G4 AM6442.G5 AM6442.G6 AM6442.G8 AM6442.G10 AM6442.G11 AM6442.G12 AM6442.G13 AM6442.G14 AM6442.G15 AM6442.G17 AM6442.G18 AM6442.G19 AM6442.G20 AM6442.G21 AM6442.H1 AM6442.H2 AM6442.H3 AM6442.H4 AM6442.H5 AM6442.H7 AM6442.H9 AM6442.H10 AM6442.H12 AM6442.H13 AM6442.H14 AM6442.H15 AM6442.H16 AM6442.H17 AM6442.H18 AM6442.H19 AM6442.J1 AM6442.J2 AM6442.J3 AM6442.J4 AM6442.J5 AM6442.J6 AM6442.J8 AM6442.J10 AM6442.J11 AM6442.J12 AM6442.J13 AM6442.J15 AM6442.J16 AM6442.J17 AM6442.J18 AM6442.J19 AM6442.J20 AM6442.J21 AM6442.K1 AM6442.K2 AM6442.K3 AM6442.K4 AM6442.K5 AM6442.K7 AM6442.K9 AM6442.K10 AM6442.K11 AM6442.K12 AM6442.K13 AM6442.K14 AM6442.K15 AM6442.K16 AM6442.K17 AM6442.K18 AM6442.K19 AM6442.K20 AM6442.K21 AM6442.L5 AM6442.L6 AM6442.L8 AM6442.L10 AM6442.L11 AM6442.L12 AM6442.L13 AM6442.L14 AM6442.L15 AM6442.L17 AM6442.L18 AM6442.L19 AM6442.L20 AM6442.L21 AM6442.M5 AM6442.M7 AM6442.M9 AM6442.M11 AM6442.M13 AM6442.M14 AM6442.M15 AM6442.M16 AM6442.M17 AM6442.M18 AM6442.M19 AM6442.M20 AM6442.M21 AM6442.N6 AM6442.N8 AM6442.N10 AM6442.N12 AM6442.N14 AM6442.N16 AM6442.N17 AM6442.N18 AM6442.N19 AM6442.N20 AM6442.N21 AM6442.P2 AM6442.P3 AM6442.P4 AM6442.P5 AM6442.P7 AM6442.P9 AM6442.P11 AM6442.P12 AM6442.P13 AM6442.P14 AM6442.P15 AM6442.P16 AM6442.P17 AM6442.P19 AM6442.P20 AM6442.P21 AM6442.R1 AM6442.R2 AM6442.R3 AM6442.R4 AM6442.R5 AM6442.R6 AM6442.R8 AM6442.R10 AM6442.R11 AM6442.R13 AM6442.R14 AM6442.R15 AM6442.R16 AM6442.R17 AM6442.R18 AM6442.R19 AM6442.R20 AM6442.R21 AM6442.T1 AM6442.T2 AM6442.T3 AM6442.T4 AM6442.T5 AM6442.T6 AM6442.T7 AM6442.T9 AM6442.T12 AM6442.T13 AM6442.T14 AM6442.T17 AM6442.T18 AM6442.T19 AM6442.T20 AM6442.T21 AM6442.U1 AM6442.U2 AM6442.U4 AM6442.U5 AM6442.U6 AM6442.U7 AM6442.U8 AM6442.U9 AM6442.U10 AM6442.U11 AM6442.U12 AM6442.U13 AM6442.U14 AM6442.U15 AM6442.U16 AM6442.U17 AM6442.U18 AM6442.U19 AM6442.U20 AM6442.U21 AM6442.V1 AM6442.V2 AM6442.V3 AM6442.V4 AM6442.V5 AM6442.V6 AM6442.V7 AM6442.V8 AM6442.V9 AM6442.V10 AM6442.V11 AM6442.V12 AM6442.V13 AM6442.V14 AM6442.V15 AM6442.V16 AM6442.V18 AM6442.V19 AM6442.V20 AM6442.V21 AM6442.W1 AM6442.W2 AM6442.W3 AM6442.W4 AM6442.W5 AM6442.W6 AM6442.W7 AM6442.W8 AM6442.W9 AM6442.W11 AM6442.W12 AM6442.W13 AM6442.W14 AM6442.W15 AM6442.W16 AM6442.W17 AM6442.W19 AM6442.W20 AM6442.W21 AM6442.Y1 AM6442.Y2 AM6442.Y3 AM6442.Y4 AM6442.Y5 AM6442.Y6 AM6442.Y7 AM6442.Y8 AM6442.Y9 AM6442.Y10 AM6442.Y11 AM6442.Y12 AM6442.Y13 AM6442.Y15 AM6442.Y16 AM6442.Y18 AM6442.Y20 AM6442.Y21 BERG1. BERG2. BERG3. BERG4. BERG5. BERG6. BERG7. BERG8. BERG9. BERG10. BERG11. BERG12. BERG13. BERG14. BERG15. BERG16. BERG17. BERG18. BERG19. BERG20. BERG21. BERG22. BERG23. BERG24. BERG25. BERG26. BERG27. BERG28. BERG29. BERG30. BERG31. BERG32. BERG33. BERG34. BERG35. BERG36. BERG37. BERG38. BERG39. BERG40. BERG41. BERG42. BERG43. BERG44. BERG45. BERG46. BERG47. BERG48. BERG49. BERG50. BERG51. BERG52. BERG53. BERG54. BERG55. BERG56. BERG57. BERG58. BERG59. BERG60. BERG61. BERG62. BERG63. BERG64. BERG65. BERG66. BERG67. BERG68. BERG69. BERG70. BERG71. BERG72. BERG73. BERG74. BERG75. BERG76. BERG77. BERG78. BERG79. BERG80. BERG81. BERG82. BERG83. BERG84. BERG85. BERG86. BERG87. BERG88. BERG89. BERG90. BERG91. BERG92. BERG93. BERG94. BERG95. BERG96. BERG97. BERG98. BERG99. BERG100. BERG101. BERG102. BERG103. BERG104. BERG105. BERG106. BERG107. BERG108. BERG109. BERG110. BERG111. BERG112. BERG113. BERG114. BERG115. BERG116. BERG117. BERG118. BERG119. BERG120. BERG121. BERG122. BERG123. BERG124. BERG125. BERG126. BERG127. BERG128. BERG129. BERG130. BERG131. BERG132. BERG133. BERG134. BERG135. BERG136. BERG137. BERG138. BERG139. BERG140. BERG141. BERG142. BERG143. BERG144. BERG145. BERG146. BERG147. BERG148. BERG149. BERG150. BERG151. BERG152. BERG153. BERG154. BERG155. BERG156. BERG157. BERG158. BERG159. BERG160. BERG161. BERG162. BERG163. BERG164. BERG165. BERG166. BERG167. BERG168. BERG169. BERG170. BERG171. BERG172. BERG173. BERG174. BERG175. BERG176. BERG177. BERG178. BERG179. BERG180. BERG181. BERG182. BERG183. BERG184. BERG185. BERG186. BERG187. BERG188. BERG189. BERG190. BERG191. BERG192. BERG193. BERG194. BERG195. BERG196. BERG197. BERG198. BERG199. BERG200. DP83867IRRGZR.1 DP83867IRRGZR.2 DP83867IRRGZR.3 DP83867IRRGZR.4 DP83867IRRGZR.5 DP83867IRRGZR.6 DP83867IRRGZR.7 DP83867IRRGZR.8 DP83867IRRGZR.9 DP83867IRRGZR.10 DP83867IRRGZR.11 DP83867IRRGZR.12 DP83867IRRGZR.13 DP83867IRRGZR.14 DP83867IRRGZR.15 DP83867IRRGZR.16 DP83867IRRGZR.17 DP83867IRRGZR.18 DP83867IRRGZR.19 DP83867IRRGZR.20 DP83867IRRGZR.21 DP83867IRRGZR.22 DP83867IRRGZR.23 DP83867IRRGZR.24 DP83867IRRGZR.25 DP83867IRRGZR.26 DP83867IRRGZR.27 DP83867IRRGZR.28 DP83867IRRGZR.29 DP83867IRRGZR.30 DP83867IRRGZR.31 DP83867IRRGZR.32 DP83867IRRGZR.33 DP83867IRRGZR.34 DP83867IRRGZR.35 DP83867IRRGZR.36 DP83867IRRGZR.37 DP83867IRRGZR.38 DP83867IRRGZR.39 DP83867IRRGZR.40 DP83867IRRGZR.41 DP83867IRRGZR.42 DP83867IRRGZR.43 DP83867IRRGZR.44 DP83867IRRGZR.45 DP83867IRRGZR.46 DP83867IRRGZR.47 DP83867IRRGZR.48 DP83867IRRGZR.49 LPDDR4.A1 LPDDR4.A2 LPDDR4.A8 LPDDR4.A11 LPDDR4.A12 LPDDR4.AA1 LPDDR4.AA2 LPDDR4.AA4 LPDDR4.AA9 LPDDR4.AA11 LPDDR4.AA12 LPDDR4.AB1 LPDDR4.AB2 LPDDR4.AB11 LPDDR4.AB12 LPDDR4.B1 LPDDR4.B12 LPDDR4.G11 LPDDR4.H3 LPDDR4.J5 LPDDR4.K5 LPDDR4.K8 LPDDR4.N5 LPDDR4.N8 LPDDR4.P2 LPDDR4.P4 LPDDR4.P5 LPDDR4.P8 LPDDR4.P9 LPDDR4.P11 LPDDR4.R2 LPDDR4.R3 LPDDR4.R4 LPDDR4.R9 LPDDR4.R10 LPDDR4.R11 LPDDR4.T2 LPDDR4.U2 LPDDR4.U4 LPDDR4.U9 LPDDR4.U11 LPDDR4.V2 LPDDR4.V3 LPDDR4.V4 LPDDR4.V9 LPDDR4.V10 LPDDR4.V11 LPDDR4.W3 LPDDR4.W10 LPDDR4.Y2 LPDDR4.Y3 LPDDR4.Y4 LPDDR4.Y9 LPDDR4.Y10 LPDDR4.Y11 LS1.1 LS1.2 LS1.3 LS1.4 LS1.5 LS1.6 LS1.7 LS1.8 LS1.9 PMIC1.1 PMIC1.2 PMIC1.3 PMIC1.4 PMIC1.5 PMIC1.6 PMIC1.7 PMIC1.8 PMIC1.9 PMIC1.10 PMIC1.11 PMIC1.12 PMIC1.13 PMIC1.14 PMIC1.15 PMIC1.16 PMIC1.17 PMIC1.18 PMIC1.19 PMIC1.20 PMIC1.21 PMIC1.22 PMIC1.23 PMIC1.24 PMIC1.25 PMIC1.26 PMIC1.27 PMIC1.28 PMIC1.29 PMIC1.30 PMIC1.31 PMIC1.32 PMIC1.33

## Polygon pours and split planes (outlines as drawn)
GND on GNDU "GND" (solid, remove dead copper, pour order 0): -25.8,25.8 25.8,25.8 25.8,-25.8 25.6,-25.6 -25.6,-25.6
GND on GNDU "GND" (solid, remove dead copper, pour order 2): -25.8,25.8 25.8,25.8 25.8,-25.8 -25.8,-25.8
GND on GNDU "GND" (solid, remove dead copper, pour order 4): -25.8,25.8 25.8,25.8 25.8,-25.8 -25.8,-25.8
GND on GNDD "GND" (solid, remove dead copper, pour order 3): -25.8,25.8 25.8,25.8 25.8,-25.8 -25.8,-25.8

## Text inside footprints (layer, text, board x,y; h text height)
"C BuckMain3.3V Feedback": Top Overlay "C" at -11.767,-22.65 h0.7 r180
"C BuckMain3.3V VIN": Top Overlay "C" at -18.233,-25.35 h0.7
"C BuckMain3.3V VOUT": Top Overlay "C" at -11.767,-20.65 h0.7 r180
"L BuckMain3.3V PowerGoodPullUp": Top Overlay "I" at -12.117,-25.35 h0.7
PMIC1: Mechanical 13 "*" at -17.575,-11.885 h1.27
"R BuckMain3.3V Divider1": Top Overlay "R" at -14.65,-22.233 h0.7 r90
"R BuckMain3.3V Divider2": Top Overlay "R" at -17.767,-22.65 h0.7 r180
"R BuckMain3.3V Divider3": Top Overlay "R" at -17.767,-20.65 h0.7 r180
"R BuckMain3.3V PowerGoodPullUp": Top Overlay "R" at -15.233,-19.35 h0.7
R_DDR_ODT_CA: Top Overlay "R" at -9.35,-16.767 h0.7 r270
R_DDR_ZQ: Top Overlay "R" at -4.167,-9.35 h0.7 r180